# Altium PCB Payload PC104.PcbDoc (part 2 of 2)
Units mm, origin at the board's own origin, x right, y up, seen from the top; angles counter-clockwise.
Board outline 90.17 x 95.88 mm, 4 copper layers (Top Layer, Int1 (GND), Int2 (PWR), Bottom Layer), stack 1.586 mm thick; 82 components, 45 nets, 364 pads, 982 vias.
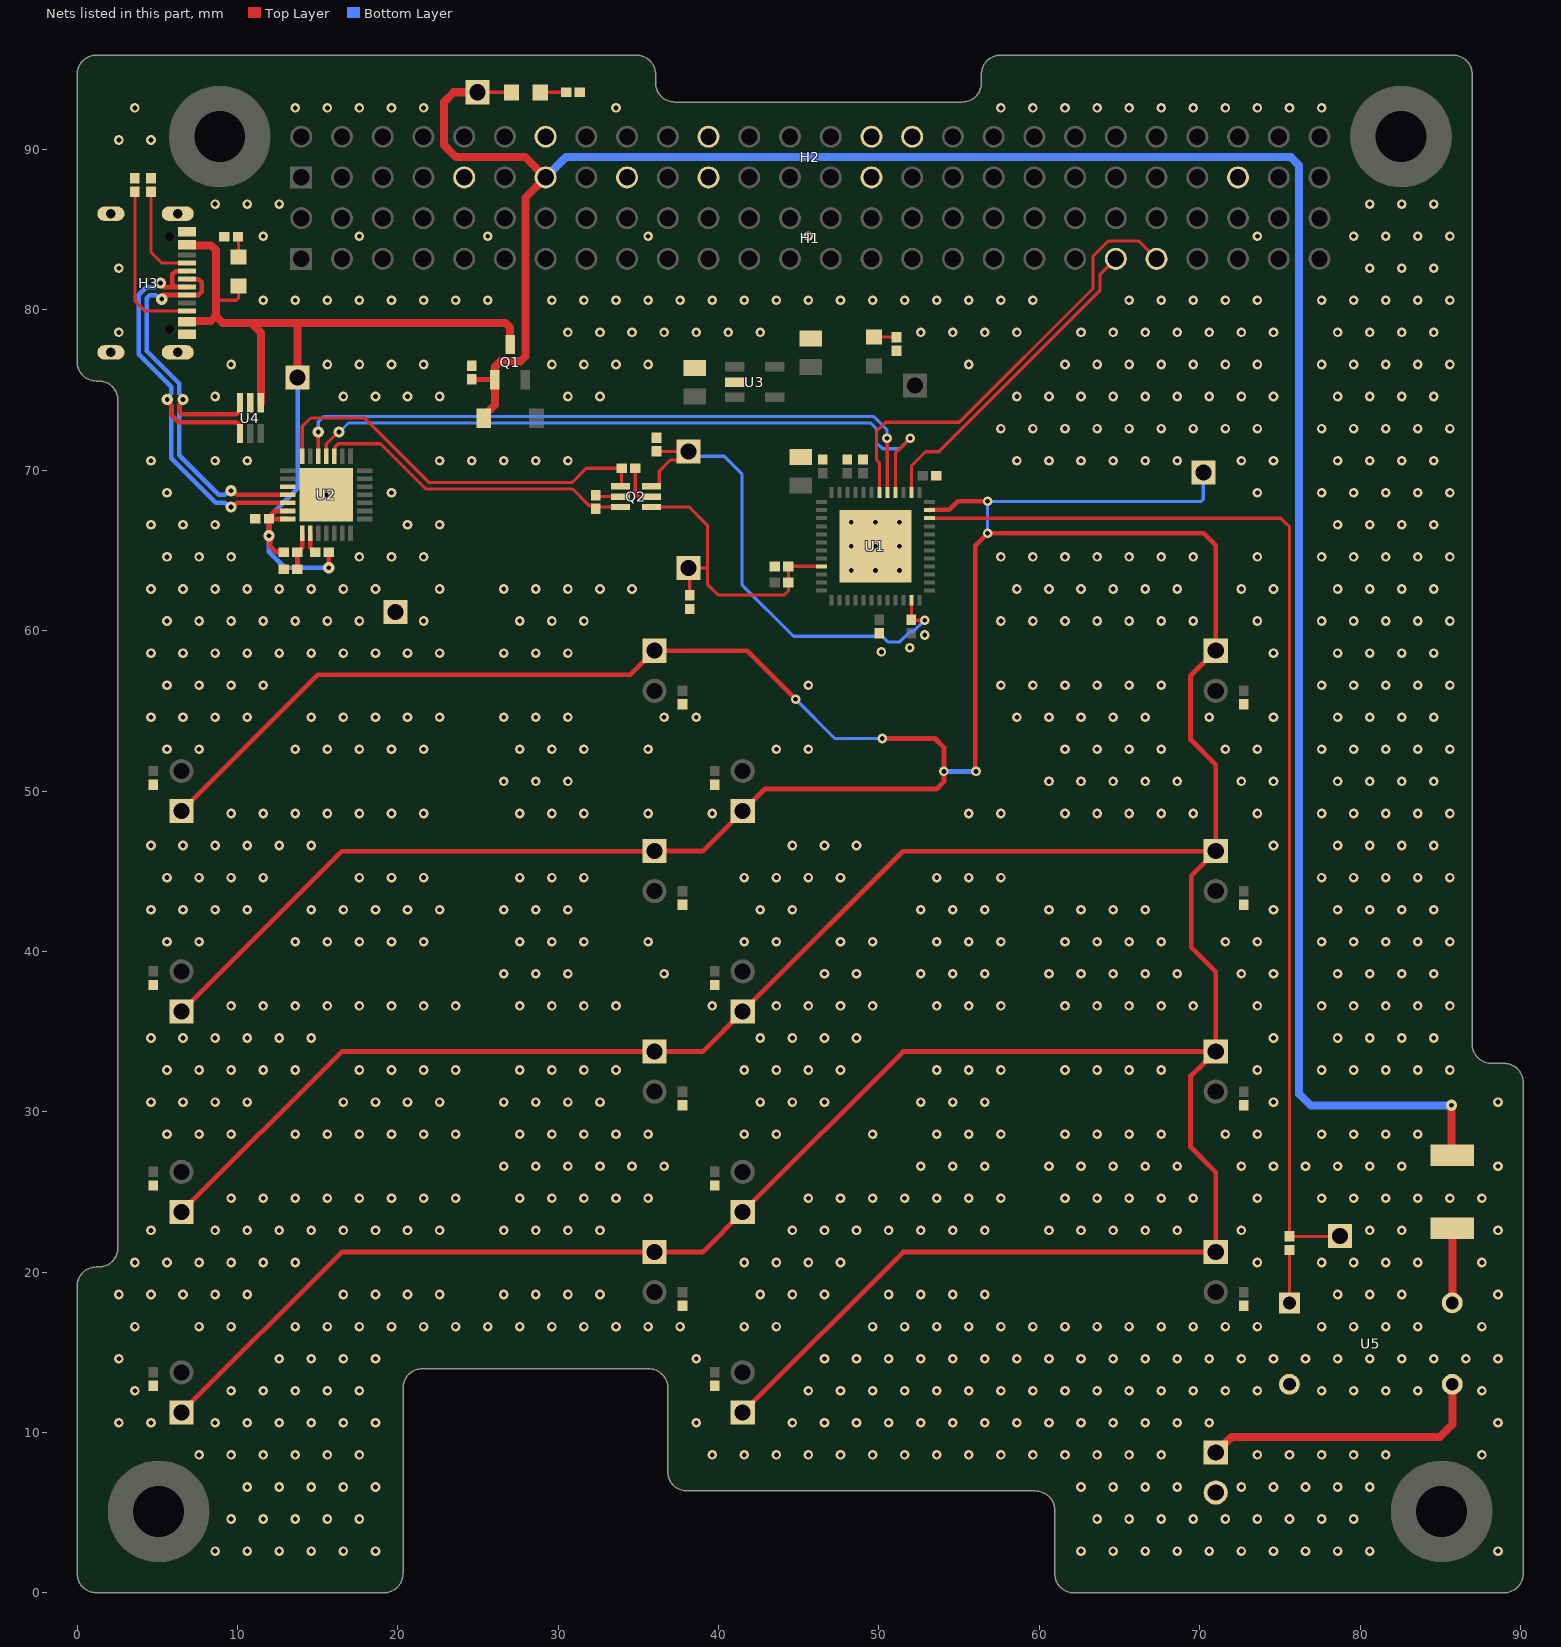
[diagram p4: the nets of this part, all layers, seen from the top]

## Via types
v1: diameter 0.6, hole 0.3, Top Layer to Bottom Layer, tented both sides, 959 vias
v2: diameter 0.7, hole 0.3, Top Layer to Bottom Layer, tented both sides, 13 vias
v3: diameter 0.6, hole 0.3, Top Layer to Bottom Layer, tented bottom, 10 vias

## Nets (pads, with @x,y where several pads share a name; then routed paths per layer and width w, separated by ;. In a path a pad name is that pad's centre, name@x,y a point inside that pad or via, vN(x,y) a via of type N, cw(c..) or ccw(c..) an arc to the next point about the centre after c; other vN are vias at no path point) (continued)
ADC3V3: ADC3V3.1 SENS0.1 SENS1.1 SENS2.1 SENS3.1 SENS4.1 SENS5.1 SENS6.1 SENS7.1 SENS8.1 SENS9.1 SENS10.1 SENS11.1 SENS12.1 SENS13.1 SENS14.1 SENS15.1 U1.35 | length 391.7
  Top Layer w0.3: SENS3.1@6.5,11.25 16.5,21.25 SENS7.1@36,21.25 39,21.25 SENS10.1@41.5,23.75 51.5,33.75 SENS14.1@71,33.75 ; SENS2.1@6.5,23.75 16.5,33.75 SENS6.1@36,33.75 39,33.75 SENS9.1@41.5,36.25 42.104,36.854 51.498,46.248 SENS13.1@70.998,46.248 ; SENS1.1@6.5,36.25 7.104,36.854 16.499,46.249 SENS5.1@35.999,46.249 ; SENS0.1@6.5,48.75 15,57.25 34.5,57.25 SENS4.1@36,58.75 41.775,58.75 v1(44.8,55.725) ; SENS5.1@36,46.25 39,46.25 SENS8.1@41.5,48.75 42.875,50.125 53.6,50.125 54.05,50.575 v1(54.05,51.225) 54.05,52.719 53.494,53.275 v1(50.2,53.275) ; SENS11.1@41.5,11.25 51.5,21.25 SENS15.1@71,21.25 71,26.23 69.425,27.805 69.425,32.202 69.959,32.736 69.986,32.736 SENS14.1@71,33.75 ; U1.35@53.14,67.51 53.165,67.535 54.379,67.535 54.919,68.075 v1(56.775,68.075) ; v1(56.05,51.225) 56,51.275 56,65.3 v1(56.775,66.075) 70.25,66.075 71,65.325 SENS12.1@71,58.75 69.425,57.175 69.425,53.218 71,51.643 SENS13.1@71,46.25 SENS13.1@70.998,46.248 ; SENS13.1@70.998,46.248 70.346,45.596 70.346,45.578 69.475,44.707 69.475,40.255 71,38.73 SENS14.1@71,33.75
  Bottom Layer w0.2: v1(44.8,55.725) 47.25,53.275 v1(50.2,53.275) ; v1@56.775,65.94 v1(56.775,66.075) v1(56.775,68.075) ; v1@56.788,68.062 70.108,68.062 70.225,68.179 ADC3V3.1@70.225,69.875
  Bottom Layer w0.3: v1@54.225,51.225 55.911,51.225 55.912,51.224 v1@55.912,51.212
Data_N: H3.A7 H3.B7 U2.5 U4.4 | length 31.7
  Top Layer w0.286: v2@5.368,81.42 H3.A7@6.845,81.42 ; v2(5.61,74.422) 5.61,74.31 5.862,74.058 5.862,73.472 6.329,73.005 9.928,73.005 10.095,72.838 10.095,72.347 U4.4@10.152,72.29 ; H3.A7@6.85,81.425 6.843,81.432 6.138,81.432 5.937,81.633 5.937,82.217 6.138,82.418 6.843,82.418 H3.B7@6.85,82.425 ; v2(9.583,67.716) 9.695,67.716 9.953,67.974 11.16,67.974 11.162,67.976 13.128,67.976 U2.5@13.133,67.971
  Bottom Layer w0.286: v2(5.198,81.676) 5.086,81.676 4.829,81.418 4.315,81.418 3.836,80.939 3.836,77.237 5.862,75.21 5.862,74.787 5.61,74.534 v2(5.61,74.422) 5.61,74.31 5.862,74.058 5.862,70.745 8.634,67.974 9.214,67.974 9.471,67.716 v2(9.583,67.716)
Data_P: H3.A6 H3.B6 U2.4 U4.3 | length 29.4
  Top Layer w0.286: v2@5.368,80.93 6.845,80.93 6.846,80.932 7.562,80.932 7.763,81.133 7.763,81.717 7.562,81.918 6.857,81.918 H3.A6@6.85,81.925 ; v2(6.604,74.422) 6.604,74.31 6.351,74.057 6.351,73.675 6.532,73.495 9.928,73.495 10.095,73.662 10.095,74.153 U4.3@10.152,74.21 ; v2(9.583,68.721) 9.695,68.721 9.953,68.463 10.957,68.463 10.96,68.465 13.128,68.465 U2.4@13.133,68.471
  Bottom Layer w0.286: v2(5.269,80.673) 5.157,80.673 4.902,80.929 4.518,80.929 4.325,80.736 4.325,77.439 6.352,75.413 6.352,74.786 6.604,74.534 v2(6.604,74.422) 6.604,74.31 6.351,74.057 6.351,70.948 8.836,68.463 9.214,68.463 9.471,68.721 v2(9.583,68.721)
DTR: Q2.1 R7.1 U2.28 | length 25.2
  Top Layer w0.2: U2.28@14.033,70.871 14.033,72.738 14.549,73.254 17.932,73.254 21.952,69.234 30.855,69.234 31.746,70.125 R7.1@33.95,70.125 33.95,69.077 Q2.1@33.884,69.011
EN: C11.1 C13.2 EN.1 Q2.4 R12.2 U1.9 | length 19.6
  Top Layer w0.2: Q2.4@35.804,67.711 38.164,67.711 39.3,66.575 39.3,64 ; C13.2@38.2,62.2 38.2,63.825 EN.1@38.125,63.9 39.2,63.9 39.3,64 ; U1.9@46.41,64.01 44.35,64.01 C11.1@44.35,64 R12.2@44.35,63 44.35,62.475 44.1,62.225 39.975,62.225 39.3,62.9 39.3,64
GND: C1.2 C2.1 C3.2 C4.2 C5.2 C6.2 C7.1 C8.1 C9.2 C10.1 C11.2 C12.1 C13.1 GND.1 H2.09 H2.14 H2.17 H2.21 H2.22 H2.29 H2.30 H2.32 H2.47 H3.A1_B12 H3.B1_A12 H3.S1 H3.S2 H3.S3 H3.S4 HEATER.2 R1.1 R2.1 R5.1 R8.2 R9.2 R10.2 R15.1 R16.1 R17.1 R18.1 R19.1 R20.1 R21.1 R22.1 R23.1 R24.1 R25.1 R26.1 R27.1 R28.1 R29.1 R30.1 U1.49 U2.3 U2.29 U3.2 U4.2 U5.2
  other v1: 8.6,2.6 10.6,2.6 12.6,2.6 14.6,2.6 16.6,2.6 18.6,2.6 62.6,2.6 64.6,2.6 66.6,2.6 68.6,2.6 70.6,2.6 72.6,2.6 74.6,2.6 76.6,2.6 78.6,2.6 80.6,2.6 88.6,2.6 9.6,4.6 11.6,4.6 13.6,4.6 15.6,4.6 17.6,4.6 63.6,4.6 65.6,4.6 67.6,4.6 69.6,4.6 71.6,4.6 73.6,4.6 75.6,4.6 77.6,4.6 79.6,4.6 10.6,6.6 12.6,6.6 14.6,6.6 16.6,6.6 18.6,6.6 62.6,6.6 64.6,6.6 66.6,6.6 68.6,6.6 72.6,6.6 74.6,6.6 76.6,6.6 78.6,6.6 80.6,6.6 7.6,8.6 9.6,8.6 11.6,8.6 13.6,8.6 15.6,8.6 17.6,8.6 39.6,8.6 41.6,8.6 43.6,8.6 45.6,8.6 47.6,8.6 49.6,8.6 51.6,8.6 53.6,8.6 55.6,8.6 57.6,8.6 59.6,8.6 61.6,8.6 63.6,8.6 65.6,8.6 67.6,8.6 73.6,8.6 75.6,8.6 77.6,8.6 79.6,8.6 81.6,8.6 87.6,8.6 2.6,10.6 4.6,10.6 8.6,10.6 10.6,10.6 12.6,10.6 14.6,10.6 16.6,10.6 18.6,10.6 38.6,10.6 44.6,10.6 46.6,10.6 48.6,10.6 50.6,10.6 52.6,10.6 54.6,10.6 56.6,10.6 58.6,10.6 60.6,10.6 62.6,10.6 64.6,10.6 66.6,10.6 68.6,10.6 70.6,10.6 88.6,10.6 3.6,12.6 9.6,12.6 11.6,12.6 13.6,12.6 15.6,12.6 17.6,12.6 45.6,12.6 47.6,12.6 49.6,12.6 51.6,12.6 53.6,12.6 55.6,12.6 57.6,12.6 59.6,12.6 61.6,12.6 63.6,12.6 65.6,12.6 67.6,12.6 69.6,12.6 71.6,12.6 73.6,12.6 77.6,12.6 79.6,12.6 81.6,12.6 83.6,12.6 87.6,12.6 2.6,14.6 12.6,14.6 14.6,14.6 16.6,14.6 18.6,14.6 38.6,14.6 46.6,14.6 48.6,14.6 50.6,14.6 52.6,14.6 54.6,14.6 56.6,14.6 58.6,14.6 60.6,14.6 62.6,14.6 64.6,14.6 66.6,14.6 68.6,14.6 70.6,14.6 72.6,14.6 74.6,14.6 76.6,14.6 78.6,14.6 80.6,14.6 82.6,14.6 84.6,14.6 86.6,14.6 88.6,14.6 3.6,16.6 7.6,16.6 9.6,16.6 13.6,16.6 15.6,16.6 17.6,16.6 19.6,16.6 21.6,16.6 23.6,16.6 25.6,16.6 27.6,16.6 29.6,16.6 31.6,16.6 33.6,16.6 35.6,16.6 37.6,16.6 41.6,16.6 43.6,16.6 49.6,16.6 51.6,16.6 53.6,16.6 55.6,16.6 57.6,16.6 59.6,16.6 61.6,16.6 63.6,16.6 65.6,16.6 67.6,16.6 69.6,16.6 71.6,16.6 73.6,16.6 77.6,16.6 79.6,16.6 81.6,16.6 83.6,16.6 87.6,16.6 2.6,18.6 4.6,18.6 6.6,18.6 8.6,18.6 10.6,18.6 16.6,18.6 18.6,18.6 20.6,18.6 22.6,18.6 26.6,18.6 28.6,18.6 30.6,18.6 32.6,18.6 42.6,18.6 44.6,18.6 46.6,18.6 50.6,18.6 52.6,18.6 54.6,18.6 56.6,18.6 78.6,18.6 80.6,18.6 82.6,18.6 88.6,18.6 3.6,20.6 5.6,20.6 7.6,20.6 9.6,20.6 11.6,20.6 13.6,20.6 41.6,20.6 43.6,20.6 45.6,20.6 47.6,20.6 73.6,20.6 77.6,20.6 79.6,20.6 81.6,20.6 83.6,20.6 87.6,20.6 4.6,22.6 8.6,22.6 10.6,22.6 12.6,22.6 14.6,22.6 16.6,22.6 18.6,22.6 20.6,22.6 22.6,22.6 26.6,22.6 28.6,22.6 30.6,22.6 32.6,22.6 44.6,22.6 46.6,22.6 48.6,22.6 50.6,22.6 52.6,22.6 54.6,22.6 56.6,22.6 60.6,22.6 62.6,22.6 64.6,22.6 66.6,22.6 68.6,22.6 72.6,22.6 80.6,22.6 82.6,22.6 88.6,22.6 9.6,24.6 11.6,24.6 13.6,24.6 15.6,24.6 17.6,24.6 19.6,24.6 21.6,24.6 23.6,24.6 27.6,24.6 29.6,24.6 31.6,24.6 33.6,24.6 35.6,24.6 45.6,24.6 47.6,24.6 49.6,24.6 51.6,24.6 53.6,24.6 55.6,24.6 57.6,24.6 61.6,24.6 63.6,24.6 65.6,24.6 67.6,24.6 69.6,24.6 73.6,24.6 77.6,24.6 79.6,24.6 81.6,24.6 83.6,24.6 85.6,24.6 87.6,24.6 26.6,26.6 28.6,26.6 30.6,26.6 32.6,26.6 34.6,26.6 36.6,26.6 52.6,26.6 54.6,26.6 56.6,26.6 60.6,26.6 62.6,26.6 64.6,26.6 66.6,26.6 68.6,26.6 72.6,26.6 74.6,26.6 76.6,26.6 78.6,26.6 80.6,26.6 82.6,26.6 88.6,26.6 5.6,28.6 7.6,28.6 9.6,28.6 13.6,28.6 15.6,28.6 17.6,28.6 19.6,28.6 21.6,28.6 23.6,28.6 27.6,28.6 29.6,28.6 31.6,28.6 33.6,28.6 35.6,28.6 41.6,28.6 43.6,28.6 49.6,28.6 53.6,28.6 55.6,28.6 57.6,28.6 61.6,28.6 63.6,28.6 65.6,28.6 67.6,28.6 71.6,28.6 73.6,28.6 77.6,28.6 79.6,28.6 81.6,28.6 83.6,28.6 4.6,30.6 6.6,30.6 8.6,30.6 10.6,30.6 16.6,30.6 18.6,30.6 20.6,30.6 22.6,30.6 26.6,30.6 28.6,30.6 30.6,30.6 32.6,30.6 42.6,30.6 44.6,30.6 46.6,30.6 52.6,30.6 54.6,30.6 56.6,30.6 74.6,30.6 88.6,30.6 5.6,32.6 7.6,32.6 9.6,32.6 11.6,32.6 13.6,32.6 17.6,32.6 19.6,32.6 21.6,32.6 23.6,32.6 27.6,32.6 29.6,32.6 31.6,32.6 33.6,32.6 41.6,32.6 43.6,32.6 45.6,32.6 47.6,32.6 53.6,32.6 55.6,32.6 57.6,32.6 61.6,32.6 63.6,32.6 65.6,32.6 67.6,32.6 73.6,32.6 77.6,32.6 79.6,32.6 81.6,32.6 83.6,32.6 85.6,32.6 4.6,34.6 6.6,34.6 8.6,34.6 10.6,34.6 12.6,34.6 14.6,34.6 42.6,34.6 44.6,34.6 46.6,34.6 48.6,34.6 74.6,34.6 78.6,34.6 80.6,34.6 82.6,34.6 84.6,34.6 9.6,36.6 11.6,36.6 13.6,36.6 15.6,36.6 17.6,36.6 19.6,36.6 21.6,36.6 23.6,36.6 27.6,36.6 29.6,36.6 31.6,36.6 33.6,36.6 39.6,36.6 43.6,36.6 45.6,36.6 47.6,36.6 49.6,36.6 53.6,36.6 55.6,36.6 57.6,36.6 61.6,36.6 63.6,36.6 65.6,36.6 67.6,36.6 69.6,36.6 73.6,36.6 77.6,36.6 79.6,36.6 81.6,36.6 83.6,36.6 85.6,36.6 26.6,38.6 28.6,38.6 30.6,38.6 36.6,38.6 46.6,38.6 48.6,38.6 52.6,38.6 54.6,38.6 56.6,38.6 60.6,38.6 62.6,38.6 64.6,38.6 66.6,38.6 68.6,38.6 72.6,38.6 74.6,38.6 78.6,38.6 80.6,38.6 82.6,38.6 84.6,38.6 5.6,40.6 7.6,40.6 13.6,40.6 15.6,40.6 17.6,40.6 19.6,40.6 21.6,40.6 27.6,40.6 29.6,40.6 31.6,40.6 35.6,40.6 41.6,40.6 43.6,40.6 47.6,40.6 49.6,40.6 53.6,40.6 55.6,40.6 57.6,40.6 61.6,40.6 63.6,40.6 65.6,40.6 67.6,40.6 71.6,40.6 73.6,40.6 77.6,40.6 79.6,40.6 81.6,40.6 83.6,40.6 85.6,40.6 4.6,42.6 6.6,42.6 8.6,42.6 10.6,42.6 14.6,42.6 16.6,42.6 18.6,42.6 20.6,42.6 22.6,42.6 26.6,42.6 28.6,42.6 30.6,42.6 42.6,42.6 44.6,42.6 52.6,42.6 54.6,42.6 56.6,42.6 60.6,42.6 62.6,42.6 64.6,42.6 66.6,42.6 74.6,42.6 78.6,42.6 80.6,42.6 82.6,42.6 84.6,42.6 5.6,44.6 7.6,44.6 9.6,44.6 11.6,44.6 17.6,44.6 19.6,44.6 21.6,44.6 27.6,44.6 29.6,44.6 31.6,44.6 41.6,44.6 43.6,44.6 45.6,44.6 47.6,44.6 53.6,44.6 55.6,44.6 57.6,44.6 77.6,44.6 79.6,44.6 81.6,44.6 83.6,44.6 85.6,44.6 4.6,46.6 6.6,46.6 8.6,46.6 10.6,46.6 12.6,46.6 14.6,46.6 44.6,46.6 46.6,46.6 48.6,46.6 74.6,46.6 78.6,46.6 80.6,46.6 82.6,46.6 84.6,46.6 9.6,48.6 11.6,48.6 13.6,48.6 15.6,48.6 17.6,48.6 19.6,48.6 21.6,48.6 27.6,48.6 29.6,48.6 31.6,48.6 35.6,48.6 39.6,48.6 55.6,48.6 57.6,48.6 61.6,48.6 63.6,48.6 65.6,48.6 67.6,48.6 69.6,48.6 73.6,48.6 77.6,48.6 79.6,48.6 81.6,48.6 83.6,48.6 85.6,48.6 26.6,50.6 28.6,50.6 30.6,50.6 60.6,50.6 62.6,50.6 64.6,50.6 66.6,50.6 68.6,50.6 72.6,50.6 74.6,50.6 78.6,50.6 80.6,50.6 82.6,50.6 84.6,50.6 5.6,52.6 7.6,52.6 13.6,52.6 15.6,52.6 17.6,52.6 19.6,52.6 21.6,52.6 27.6,52.6 29.6,52.6 31.6,52.6 35.6,52.6 43.6,52.6 45.6,52.6 61.6,52.6 63.6,52.6 65.6,52.6 67.6,52.6 71.6,52.6 73.6,52.6 77.6,52.6 79.6,52.6 81.6,52.6 83.6,52.6 85.6,52.6 4.6,54.6 6.6,54.6 8.6,54.6 10.6,54.6 14.6,54.6 16.6,54.6 18.6,54.6 20.6,54.6 22.6,54.6 26.6,54.6 28.6,54.6 30.6,54.6 36.6,54.6 38.6,54.6 58.6,54.6 60.6,54.6 62.6,54.6 64.6,54.6 66.6,54.6 70.6,54.6 74.6,54.6 78.6,54.6 80.6,54.6 82.6,54.6 84.6,54.6 5.6,56.6 7.6,56.6 9.6,56.6 11.6,56.6 45.6,56.6 57.6,56.6 59.6,56.6 61.6,56.6 63.6,56.6 65.6,56.6 67.6,56.6 77.6,56.6 79.6,56.6 81.6,56.6 83.6,56.6 85.6,56.6 4.6,58.6 6.6,58.6 8.6,58.6 10.6,58.6 12.6,58.6 14.6,58.6 16.6,58.6 18.6,58.6 20.6,58.6 22.6,58.6 26.6,58.6 28.6,58.6 30.6,58.6 74.6,58.6 78.6,58.6 80.6,58.6 82.6,58.6 84.6,58.6 50.15,58.675 51.918,58.928 52.854,59.725 5.6,60.6 7.6,60.6 9.6,60.6 11.6,60.6 13.6,60.6 15.6,60.6 17.6,60.6 21.6,60.6 27.6,60.6 29.6,60.6 31.6,60.6 57.6,60.6 59.6,60.6 61.6,60.6 63.6,60.6 65.6,60.6 67.6,60.6 69.6,60.6 73.6,60.6 77.6,60.6 79.6,60.6 81.6,60.6 83.6,60.6 85.6,60.6 4.6,62.6 6.6,62.6 8.6,62.6 10.6,62.6 12.6,62.6 14.6,62.6 16.6,62.6 18.6,62.6 22.6,62.6 26.6,62.6 28.6,62.6 30.6,62.6 32.6,62.6 34.6,62.6 58.6,62.6 60.6,62.6 62.6,62.6 64.6,62.6 66.6,62.6 68.6,62.6 72.6,62.6 74.6,62.6 78.6,62.6 80.6,62.6 82.6,62.6 84.6,62.6 5.6,64.6 7.6,64.6 9.6,64.6 17.6,64.6 19.6,64.6 21.6,64.6 57.6,64.6 59.6,64.6 61.6,64.6 63.6,64.6 65.6,64.6 67.6,64.6 69.6,64.6 73.6,64.6 77.6,64.6 79.6,64.6 81.6,64.6 83.6,64.6 85.6,64.6 4.6,66.6 6.6,66.6 8.6,66.6 20.6,66.6 22.6,66.6 78.6,66.6 80.6,66.6 82.6,66.6 84.6,66.6 5.6,68.6 19.6,68.6 73.6,68.6 77.6,68.6 79.6,68.6 81.6,68.6 83.6,68.6 85.6,68.6 4.6,70.6 8.6,70.6 10.6,70.6 22.6,70.6 24.6,70.6 26.6,70.6 28.6,70.6 30.6,70.6 58.6,70.6 60.6,70.6 62.6,70.6 64.6,70.6 66.6,70.6 68.6,70.6 72.6,70.6 74.6,70.6 78.6,70.6 80.6,70.6 82.6,70.6 84.6,70.6 57.6,72.6 59.6,72.6 61.6,72.6 63.6,72.6 65.6,72.6 67.6,72.6 69.6,72.6 71.6,72.6 73.6,72.6 77.6,72.6 79.6,72.6 81.6,72.6 83.6,72.6 85.6,72.6 8.6,74.6 16.6,74.6 18.6,74.6 20.6,74.6 22.6,74.6 30.6,74.6 32.6,74.6 58.6,74.6 60.6,74.6 62.6,74.6 64.6,74.6 66.6,74.6 68.6,74.6 70.6,74.6 72.6,74.6 74.6,74.6 78.6,74.6 80.6,74.6 82.6,74.6 84.6,74.6 9.6,76.6 15.6,76.6 17.6,76.6 19.6,76.6 21.6,76.6 29.6,76.6 31.6,76.6 33.6,76.6 35.6,76.6 55.6,76.6 61.6,76.6 63.6,76.6 65.6,76.6 67.6,76.6 69.6,76.6 71.6,76.6 73.6,76.6 77.6,76.6 79.6,76.6 81.6,76.6 83.6,76.6 85.6,76.6 2.6,78.6 30.6,78.6 32.6,78.6 34.6,78.6 36.6,78.6 38.6,78.6 40.6,78.6 42.6,78.6 52.6,78.6 54.6,78.6 56.6,78.6 58.6,78.6 62.6,78.6 64.6,78.6 66.6,78.6 68.6,78.6 70.6,78.6 72.6,78.6 74.6,78.6 78.6,78.6 80.6,78.6 82.6,78.6 84.6,78.6 11.6,80.6 13.6,80.6 15.6,80.6 17.6,80.6 19.6,80.6 21.6,80.6 23.6,80.6 25.6,80.6 29.6,80.6 31.6,80.6 33.6,80.6 35.6,80.6 37.6,80.6 39.6,80.6 41.6,80.6 43.6,80.6 45.6,80.6 47.6,80.6 49.6,80.6 51.6,80.6 53.6,80.6 55.6,80.6 57.6,80.6 59.6,80.6 65.6,80.6 67.6,80.6 69.6,80.6 71.6,80.6 73.6,80.6 77.6,80.6 79.6,80.6 81.6,80.6 83.6,80.6 85.6,80.6 2.6,82.6 80.6,82.6 82.6,82.6 84.6,82.6 11.6,84.6 17.6,84.6 25.6,84.6 35.6,84.6 45.6,84.6 73.6,84.6 79.6,84.6 81.6,84.6 83.6,84.6 85.6,84.6 8.6,86.6 10.6,86.6 12.6,86.6 80.6,86.6 82.6,86.6 84.6,86.6 2.6,90.6 4.6,90.6 3.6,92.6 13.6,92.6 15.6,92.6 17.6,92.6 19.6,92.6 21.6,92.6 33.6,92.6 57.6,92.6 59.6,92.6 61.6,92.6 63.6,92.6 65.6,92.6 67.6,92.6 69.6,92.6 71.6,92.6 73.6,92.6 75.6,92.6 77.6,92.6
  other v3: 48.275,63.76 49.775,63.76 51.275,63.76 48.275,65.26 49.775,65.26 51.275,65.26 48.275,66.76 49.775,66.76 51.275,66.76 15.533,68.471
IO0: C12.2 IO0.1 Q2.6 R11.2 U1.23 | length 32
  Top Layer w0.2: Q2.6@35.804,69.011 36.199,69.011 36.299,69.111 36.299,69.949 37,70.65 37.6,70.65 IO0.1@38.125,71.175 C12.2@36.125,71.175 ; U1.23@52.025,61.895 52.025,60.7 R11.2@52,60.675 52.027,60.648 v1(52.848,60.648)
  Bottom Layer w0.2: IO0.1@38.125,71.175 38.427,70.873 40.352,70.873 41.45,69.775 41.45,62.875 44.671,59.654 50.196,59.654 50.554,59.296 51.3,59.296 51.952,59.947 52.147,59.947 v1(52.848,60.648)
NetD2_1: D2.1 R8.1 | length 1.3
  Top Layer w0.2: R8.1@10.025,84.575 10.05,84.55 D2.1@10.05,83.3
NetD3_1: D3.1 R9.1 | length 1.6
  Top Layer w0.2: D3.1@28.876,93.574 R9.1@30.494,93.574
NetD4_1: D4.1 R10.1 | length 1.4
  Top Layer w0.2: D4.1@49.694,78.306 R10.1@51.094,78.306
NetH3_A5: H3.A5 R1.2 | length 6.3
  Top Layer w0.2: R1.2@4.6,87.375 4.6,83.6 5.275,82.925 H3.A5@6.85,82.925
NetH3_B5: H3.B5 R2.2 | length 10.3
  Top Layer w0.2: R2.2@3.6,87.375 3.6,80.575 4.25,79.925 H3.B5@6.85,79.925
NetQ2_2: Q2.2 R6.2 | length 1.6
  Top Layer w0.2: R6.2@32.325,68.45 32.414,68.361 Q2.2@33.884,68.361
NetQ2_5: Q2.5 R7.2 | length 2.6
  Top Layer w0.2: R7.2@34.8,70.125 34.8,68.583 35.022,68.361 Q2.5@35.804,68.361
NetR3_1: R3.1 U2.9 | length 1.3
  Top Layer w0.3: U2.9@14.533,66.071 14.533,65.171 14.808,64.896 R3.1@14.833,64.896
NetR4_1: R4.1 R5.2 U2.8 | length 2.4
  Top Layer w0.3: R5.2@13.733,63.821 R4.1@13.733,64.896 13.758,64.896 14.033,65.171 U2.8@14.033,66.071
NetR13_2: R13.2 U5.1 | length 3.3
  Top Layer w0.2: U5.1@75.595,18.085 R13.2@75.595,21.37
  Top Layer w0.5: U5.1@75.59,18.08 U5.1@75.595,18.085 ; R13.2@75.595,21.37 R13.2@75.6,21.375
NetR14_1: R14.1 U5.4 | length 4.6
  Top Layer w0.5: U5.4@85.75,18.08 R14.1@85.75,22.725
PWM3V3: PWM3V3.1 R13.1 U1.34 | length 70.1
  Top Layer w0.2: U1.34@53.14,67.01 75.065,67.01 75.6,66.475 R13.1@75.6,22.225 78.725,22.225 PWM3V3.1@78.75,22.25
PWM_5V: HEATER.1 U5.3 | length 18
  Top Layer w0.5: HEATER.1@71,8.75 71.975,9.725 84.975,9.725 85.75,10.5 U5.3@85.75,13
RTS: Q2.3 R6.1 U2.24 | length 20.2
  Top Layer w0.2: U2.24@16.033,70.871 16.083,70.921 16.083,71.47 16.274,71.661 18.916,71.661 21.742,68.834 30.892,68.834 31.901,67.825 32.125,67.825 32.325,67.625 R6.1@32.325,67.6 ; R6.1@32.325,67.711 Q2.3@33.884,67.711
SCL: H1.43 U1.42 | length 27.9
  Top Layer w0.2: U1.42@50.025,68.625 50.025,70.478 49.846,70.657 49.846,72.432 50.414,73 55.009,73 63.345,81.336 63.345,83.337 64.308,84.3 66.195,84.3 H1.43@67.31,83.185
SDA: H1.41 U1.38 | length 20.3
  Top Layer w0.2: U1.38@52.025,68.625 52.025,70.278 52.899,71.152 53.223,71.152 53.229,71.158 53.733,71.158 63.775,81.2 63.775,82.19 H1.41@64.77,83.185
UART_RXD: U1.40 U2.25 | length 42.9
  Top Layer w0.2: U2.25@15.533,70.871 15.533,71.637 16.261,72.365 v2@16.332,72.365 ; U1.40@51.025,68.625 51.025,71.075 v1(51.95,72)
  Bottom Layer w0.2: v2@16.332,72.365 16.918,72.95 49.475,72.95 49.846,72.579 49.846,71.729 50.229,71.346 51.296,71.346 v1(51.95,72)
  other v2: 16.332,72.39
UART_TXD: U1.41 U2.26 | length 42
  Top Layer w0.2: U2.26@15.033,70.871 15.033,72.387 v2(15.037,72.39) ; v1(50.5,72) 50.512,71.988 50.512,68.637 U1.41@50.525,68.625
  Bottom Layer w0.2: v2(15.037,72.39) 15.037,73.037 15.355,73.355 49.67,73.355 50.5,72.525 v1(50.5,72)
VBUS: C2.2 D1.2 D3.2 H2.13 Q1.1 R14.2 VBUS.1 | length 151.4
  Top Layer w0.2: VBUS.1@24.968,93.575 24.97,93.574 D3.2@27.076,93.574
  Top Layer w0.3: C2.2@24.613,75.662 Q1.1@25.8,75.662
  Top Layer w0.5: C2.2@24.6,75.675 C2.2@24.613,75.662 ; VBUS.1@24.968,93.575 23.476,93.575 22.865,92.964 22.865,90.281 23.611,89.535 27.94,89.535 H2.13@29.21,88.265 27.945,87 27.945,77.093 27.652,76.8 26.393,76.8 26.05,76.457 Q1.1@26.05,75.65 26.05,74.091 25.362,73.402 D1.2@25.362,73.25 ; v2(85.7,30.4) 85.7,27.325 R14.2@85.75,27.275
  Bottom Layer w0.5: H2.13@29.21,88.265 30.475,89.53 75.68,89.53 76.195,89.015 76.195,31.12 76.915,30.4 v2(85.7,30.4)
VUSB: C1.1 D2.2 H3.A4_B9 H3.B4_A9 Q1.3 R3.2 R4.2 U2.6 U2.7 U4.1 VUSB.1 | length 60.8
  Top Layer w0.2: 8.65,80.6 9.933,80.6 10.05,80.717 D2.2@10.05,81.5
  Top Layer w0.3: R4.2@12.883,64.896 12.408,64.896 12.035,65.269 12.035,65.844 v2(11.958,65.921) C1.1@11.958,66.971 C1.1@11.983,66.971 ; U2.7@13.133,66.971 C1.1@11.983,66.971 ; U2.6@13.133,67.471 12.309,67.471 12.133,67.295 12.133,67.121 C1.1@11.983,66.971 ; v2(15.683,63.921) R3.2@15.683,64.896 ; 16.55,79.1 16.65,79.2
  Top Layer w0.5: H3.B4_A9@6.85,79.275 6.9,79.325 8.357,79.325 8.65,79.618 ; H3.A4_B9@6.85,84.075 6.9,84.025 8.357,84.025 8.65,83.732 8.65,80.6 8.65,79.618 ; U4.1@11.452,74.21 11.452,78.573 10.825,79.2 ; VUSB.1@13.75,75.775 13.75,79.2 ; Q1.3@27,77.85 27,78.9 26.7,79.2 16.65,79.2 13.75,79.2 ; 8.65,79.618 9.068,79.2 10.825,79.2 ; 10.825,79.2 13.75,79.2
  Bottom Layer w0.3: VUSB.1@13.75,75.775 13.75,68.875 11.958,67.083 v2(11.958,65.921) 11.958,64.921 12.958,63.921 v2(15.683,63.921)
pads on no net: H1.01 H1.02 H1.03 H1.04 H1.05 H1.06 H1.07 H1.08 H1.09 H1.10 H1.11 H1.12 H1.13 H1.14 H1.15 H1.16 H1.17 H1.18 H1.19 H1.20 H1.21 H1.22 H1.23 H1.24 H1.25 H1.26 H1.27 H1.28 H1.29 H1.30 H1.31 H1.32 H1.33 H1.34 H1.35 H1.36 H1.37 H1.38 H1.39 H1.40 H1.42 H1.44 H1.45 H1.46 H1.47 H1.48 H1.49 H1.50 H1.51 H1.52 H2.01 H2.02 H2.03 H2.04 H2.05 H2.06 H2.07 H2.08 H2.10 H2.11 H2.12 H2.15 H2.16 H2.18 H2.19 H2.20 H2.23 H2.24 H2.25 H2.26 H2.27 H2.28 H2.31 H2.33 H2.34 H2.35 H2.36 H2.37 H2.38 H2.39 H2.40 H2.41 H2.42 H2.43 H2.44 H2.45 H2.46 H2.48 H2.49 H2.50 H2.51 H2.52 H3.A8 H3.B8 H3.PTH U1.2 U1.21 U1.22 U1.25 U1.26 U1.27 U1.28 U1.29 U1.30 U1.31 U1.32 U1.33 U1.36 U1.44 U1.45 U1.47 U1.48 U2.1 U2.2 U2.10 U2.11 U2.12 U2.13 U2.14 U2.15 U2.16 U2.17 U2.18 U2.19 U2.20 U2.21 U2.22 U2.23 U2.27 U3.4 U4.5 U4.6

## Polygon pours and split planes (outlines as drawn)
GND on Top Layer "GND_L01_P023" (solid, pour order 23): 1.193,0.51 cw(c1.193,1.196) 0.508,1.196 0.508,19.126 cw(c0.508,19.126) 0.508,19.126 cw(c1.194,19.126) 1.194,19.812 1.346,19.812 ccw(c1.346,21.514) 3.048,21.514 3.048,74.371 ccw(c1.346,74.371) 1.346,76.073 1.194,76.073 cw(c1.194,76.759) 0.508,76.759 0.509,76.722 0.509,94.69 ccw(c0.508,94.69) 0.508,94.691 cw(c1.194,94.691) 1.194,95.377 34.874,95.377 cw(c34.874,94.691) 35.56,94.691 35.56,94.158 ccw(c37.262,94.158) 37.262,92.456 55.194,92.456 ccw(c55.194,94.158) 56.896,94.158 56.896,94.691 cw(c57.582,94.691) 57.582,95.377 85.801,95.377 cw(c85.801,94.691) 86.487,94.691 86.487,34.214 ccw(c88.189,34.214) 88.189,32.512 88.976,32.512 cw(c88.976,31.826) 89.662,31.826 89.662,1.194 cw(c88.976,1.194) 88.976,0.508 62.154,0.508 cw(c62.154,1.194) 61.468,1.194 61.468,5.156 ccw(c59.766,5.156) 59.766,6.858 38.024,6.858 cw(c38.024,7.544) 37.338,7.544 37.338,12.776 ccw(c35.636,12.776) 35.636,14.478 21.514,14.478 ccw(c21.514,12.776) 19.812,12.776 19.812,1.194 cw(c19.126,1.194) 19.126,0.508 ccw(c19.124,0.508) 19.124,0.51
3V3 on Top Layer "3V3_L01_P002" (solid, pour order 2): 46.2,70.1 46.2,69.725 44.35,69.725 44.35,66.4 46.775,66.4 46.775,69.125 46.8,69.125 46.8,70.1
3V3 on Top Layer "3V3_L01_P003" (solid, pour order 3): 46.175,70.075 49.325,70.075 49.325,69.475 46.175,69.475
3V3 on Int2 (PWR) "3V3_L03_P021" (solid, pour order 21): 41.148,58.598 41.148,76.276 cw(c41.834,76.276) 41.834,76.962 53.391,76.962 cw(c53.391,76.276) 54.077,76.276 54.077,58.598 cw(c53.391,58.598) 53.391,57.912 41.834,57.912 cw(c41.834,58.598)
GND on Int2 (PWR) "GND_L03_P024" (solid, pour order 24): 1.193,0.51 cw(c1.193,1.196) 0.508,1.196 0.508,19.126 cw(c0.508,19.126) 0.508,19.126 cw(c1.194,19.126) 1.194,19.812 1.346,19.812 ccw(c1.346,21.514) 3.048,21.514 3.048,74.371 ccw(c1.346,74.371) 1.346,76.073 1.194,76.073 cw(c1.194,76.759) 0.508,76.759 0.509,76.722 0.509,94.69 ccw(c0.508,94.69) 0.508,94.691 cw(c1.194,94.691) 1.194,95.377 34.874,95.377 cw(c34.874,94.691) 35.56,94.691 35.56,94.158 ccw(c37.262,94.158) 37.262,92.456 55.194,92.456 ccw(c55.194,94.158) 56.896,94.158 56.896,94.691 cw(c57.582,94.691) 57.582,95.377 85.801,95.377 cw(c85.801,94.691) 86.487,94.691 86.487,34.214 ccw(c88.189,34.214) 88.189,32.512 88.976,32.512 cw(c88.976,31.826) 89.662,31.826 89.662,1.194 cw(c88.976,1.194) 88.976,0.508 62.154,0.508 cw(c62.154,1.194) 61.468,1.194 61.468,5.156 ccw(c59.766,5.156) 59.766,6.858 38.024,6.858 cw(c38.024,7.544) 37.338,7.544 37.338,12.776 ccw(c35.636,12.776) 35.636,14.478 21.514,14.478 ccw(c21.514,12.776) 19.812,12.776 19.812,1.194 cw(c19.126,1.194) 19.126,0.508 ccw(c19.124,0.508) 19.124,0.51
GND on Int1 (GND) "GND_L02_P022" (solid, pour order 22): 1.193,0.51 cw(c1.193,1.196) 0.508,1.196 0.508,19.126 cw(c0.508,19.126) 0.508,19.126 cw(c1.194,19.126) 1.194,19.812 1.346,19.812 ccw(c1.346,21.514) 3.048,21.514 3.048,74.371 ccw(c1.346,74.371) 1.346,76.073 1.194,76.073 cw(c1.194,76.759) 0.508,76.759 0.509,76.722 0.509,94.69 ccw(c0.508,94.69) 0.508,94.691 cw(c1.194,94.691) 1.194,95.377 34.874,95.377 cw(c34.874,94.691) 35.56,94.691 35.56,94.158 ccw(c37.262,94.158) 37.262,92.456 55.194,92.456 ccw(c55.194,94.158) 56.896,94.158 56.896,94.691 cw(c57.582,94.691) 57.582,95.377 85.801,95.377 cw(c85.801,94.691) 86.487,94.691 86.487,34.214 ccw(c88.189,34.214) 88.189,32.512 88.976,32.512 cw(c88.976,31.826) 89.662,31.826 89.662,1.194 cw(c88.976,1.194) 88.976,0.508 62.154,0.508 cw(c62.154,1.194) 61.468,1.194 61.468,5.156 ccw(c59.766,5.156) 59.766,6.858 38.024,6.858 cw(c38.024,7.544) 37.338,7.544 37.338,12.776 ccw(c35.636,12.776) 35.636,14.478 21.514,14.478 ccw(c21.514,12.776) 19.812,12.776 19.812,1.194 cw(c19.126,1.194) 19.126,0.508 ccw(c19.124,0.508) 19.124,0.51
GND on Bottom Layer "GND_L04_P020" (solid, pour order 20): 1.193,0.51 cw(c1.193,1.196) 0.508,1.196 0.508,19.126 cw(c0.508,19.126) 0.508,19.126 cw(c1.194,19.126) 1.194,19.812 1.346,19.812 ccw(c1.346,21.514) 3.048,21.514 3.048,74.371 ccw(c1.346,74.371) 1.346,76.073 1.194,76.073 cw(c1.194,76.759) 0.508,76.759 0.509,76.722 0.509,94.69 ccw(c0.508,94.69) 0.508,94.691 cw(c1.194,94.691) 1.194,95.377 34.874,95.377 cw(c34.874,94.691) 35.56,94.691 35.56,94.158 ccw(c37.262,94.158) 37.262,92.456 55.194,92.456 ccw(c55.194,94.158) 56.896,94.158 56.896,94.691 cw(c57.582,94.691) 57.582,95.377 85.801,95.377 cw(c85.801,94.691) 86.487,94.691 86.487,34.214 ccw(c88.189,34.214) 88.189,32.512 88.976,32.512 cw(c88.976,31.826) 89.662,31.826 89.662,1.194 cw(c88.976,1.194) 88.976,0.508 62.154,0.508 cw(c62.154,1.194) 61.468,1.194 61.468,5.156 ccw(c59.766,5.156) 59.766,6.858 38.024,6.858 cw(c38.024,7.544) 37.338,7.544 37.338,12.776 ccw(c35.636,12.776) 35.636,14.478 21.514,14.478 ccw(c21.514,12.776) 19.812,12.776 19.812,1.194 cw(c19.126,1.194) 19.126,0.508 ccw(c19.124,0.508) 19.124,0.51

## Silkscreen, mask and mechanical layers (free items; w line width, h text height)
Top Overlay:
  text "2023" at 82.975,73.485 h1.3 r90
  text "CubeSTEP Research" at 80.3,28.125 h3 r90
  text "Cal Poly Pomona" at 82.542,27.975 h1.3 r90
Bottom Overlay:
  text "Professor Navid Nakhjiri /  / Basil Aranda / Nelson Chong / Daniella Dorantes / Chris Garner / David Hyatt / Benjamin James / Raymond Lee / Andrew Lombera / Jason Luc / Xavier Luna / Lachlan Mccarthy / Marissa Miranda / Diego Ramirez / Fateme Tahmek / Ali Uysal" at 68.375,1.712 h1.52
Mechanical 1:
  lines w0.254: 0.508,76.759 ccw(c1.194,76.759) 1.194,76.073 1.346,76.073 cw(c1.346,74.371) 3.048,74.371 3.048,21.514 cw(c1.346,21.514) 1.346,19.812 1.194,19.812 ccw(c1.194,19.126) 0.508,19.126 ; 0.509,76.722 0.509,94.69 ccw(c0.508,94.69) 0.508,94.691 cw(c1.194,94.691) 1.194,95.377 34.874,95.377 cw(c34.874,94.691) 35.56,94.691 35.56,94.158 ccw(c37.262,94.158) 37.262,92.456 55.194,92.456 ccw(c55.194,94.158) 56.896,94.158 56.896,94.691 cw(c57.582,94.691) 57.582,95.377 85.801,95.377 cw(c85.801,94.691) 86.487,94.691 86.487,34.214 ccw(c88.189,34.214) 88.189,32.512 88.976,32.512 cw(c88.976,31.826) 89.662,31.826 89.662,1.194 cw(c88.976,1.194) 88.976,0.508 62.154,0.508 cw(c62.154,1.194) 61.468,1.194 61.468,5.156 ccw(c59.766,5.156) 59.766,6.858 38.024,6.858 cw(c38.024,7.544) 37.338,7.544 37.338,12.776 ccw(c35.636,12.776) 35.636,14.478 21.514,14.478 ccw(c21.514,12.776) 19.812,12.776 19.812,1.194 cw(c19.126,1.194) 19.126,0.508 ccw(c19.124,0.508) 19.124,0.51 1.193,0.51 cw(c1.193,1.196) 0.508,1.196 0.508,19.126 ; 0.508,19.126 ccw(c0.508,19.126) 0.508,19.126 ; 88.968,33.02 ccw(c88.968,33.02) 88.968,33.02 ; 88.968,33.02 cw(c88.976,31.826) 90.17,31.826 90.17,1.194 cw(c88.976,1.194) 88.976,0 62.154,0 cw(c62.154,1.194) 60.96,1.194 60.96,5.156 ccw(c59.766,5.156) 59.766,6.35 38.024,6.35 cw(c38.024,7.544) 36.83,7.544 36.83,12.776 ccw(c35.636,12.776) 35.636,13.97 21.514,13.97 ccw(c21.514,12.776) 20.32,12.776 20.32,1.194 cw(c19.126,1.194) 19.126,0 1.196,0 cw(c1.196,0.002) 1.193,0.002 cw(c1.193,1.196) 0,1.168 0,19.126 cw(c1.194,19.126) 1.194,20.32 1.346,20.32 ccw(c1.346,21.514) 2.54,21.514 2.54,74.371 ccw(c1.346,74.371) 1.346,75.565 1.194,75.565 cw(c1.194,76.759) 0,76.759 0,94.691 cw(c1.194,94.691) 1.194,95.885 34.874,95.885 cw(c34.874,94.691) 36.068,94.691 36.068,94.158 ccw(c37.262,94.158) 37.262,92.964 55.194,92.964 ccw(c55.194,94.158) 56.388,94.158 56.388,94.691 cw(c57.582,94.691) 57.582,95.885 85.801,95.885 cw(c85.801,94.691) 86.995,94.691 86.995,34.214 ccw(c88.189,34.214) 88.189,33.02 88.968,33.02 ; 41.148,58.598 ccw(c41.834,58.598) 41.834,57.912 53.391,57.912 ccw(c53.391,58.598) 54.077,58.598 54.077,76.276 ccw(c53.391,76.276) 53.391,76.962 41.834,76.962 ccw(c41.834,76.276) 41.148,76.276 41.148,58.598

## Text inside footprints (layer, text, board x,y; h text height)
H3: Top 3D Body "PCB EDGE" at 0.2,76.475 h0.61 r270